# Altium PCB PCB.pcbdoc (part 1 of 3)
Units mm, origin at the board's own origin, x right, y up, seen from the top; angles counter-clockwise.
Board outline 351.03 x 186.31 mm, 2 copper layers (Top Layer, Bottom Layer); 478 components, 293 nets, 1523 pads, 747 vias.
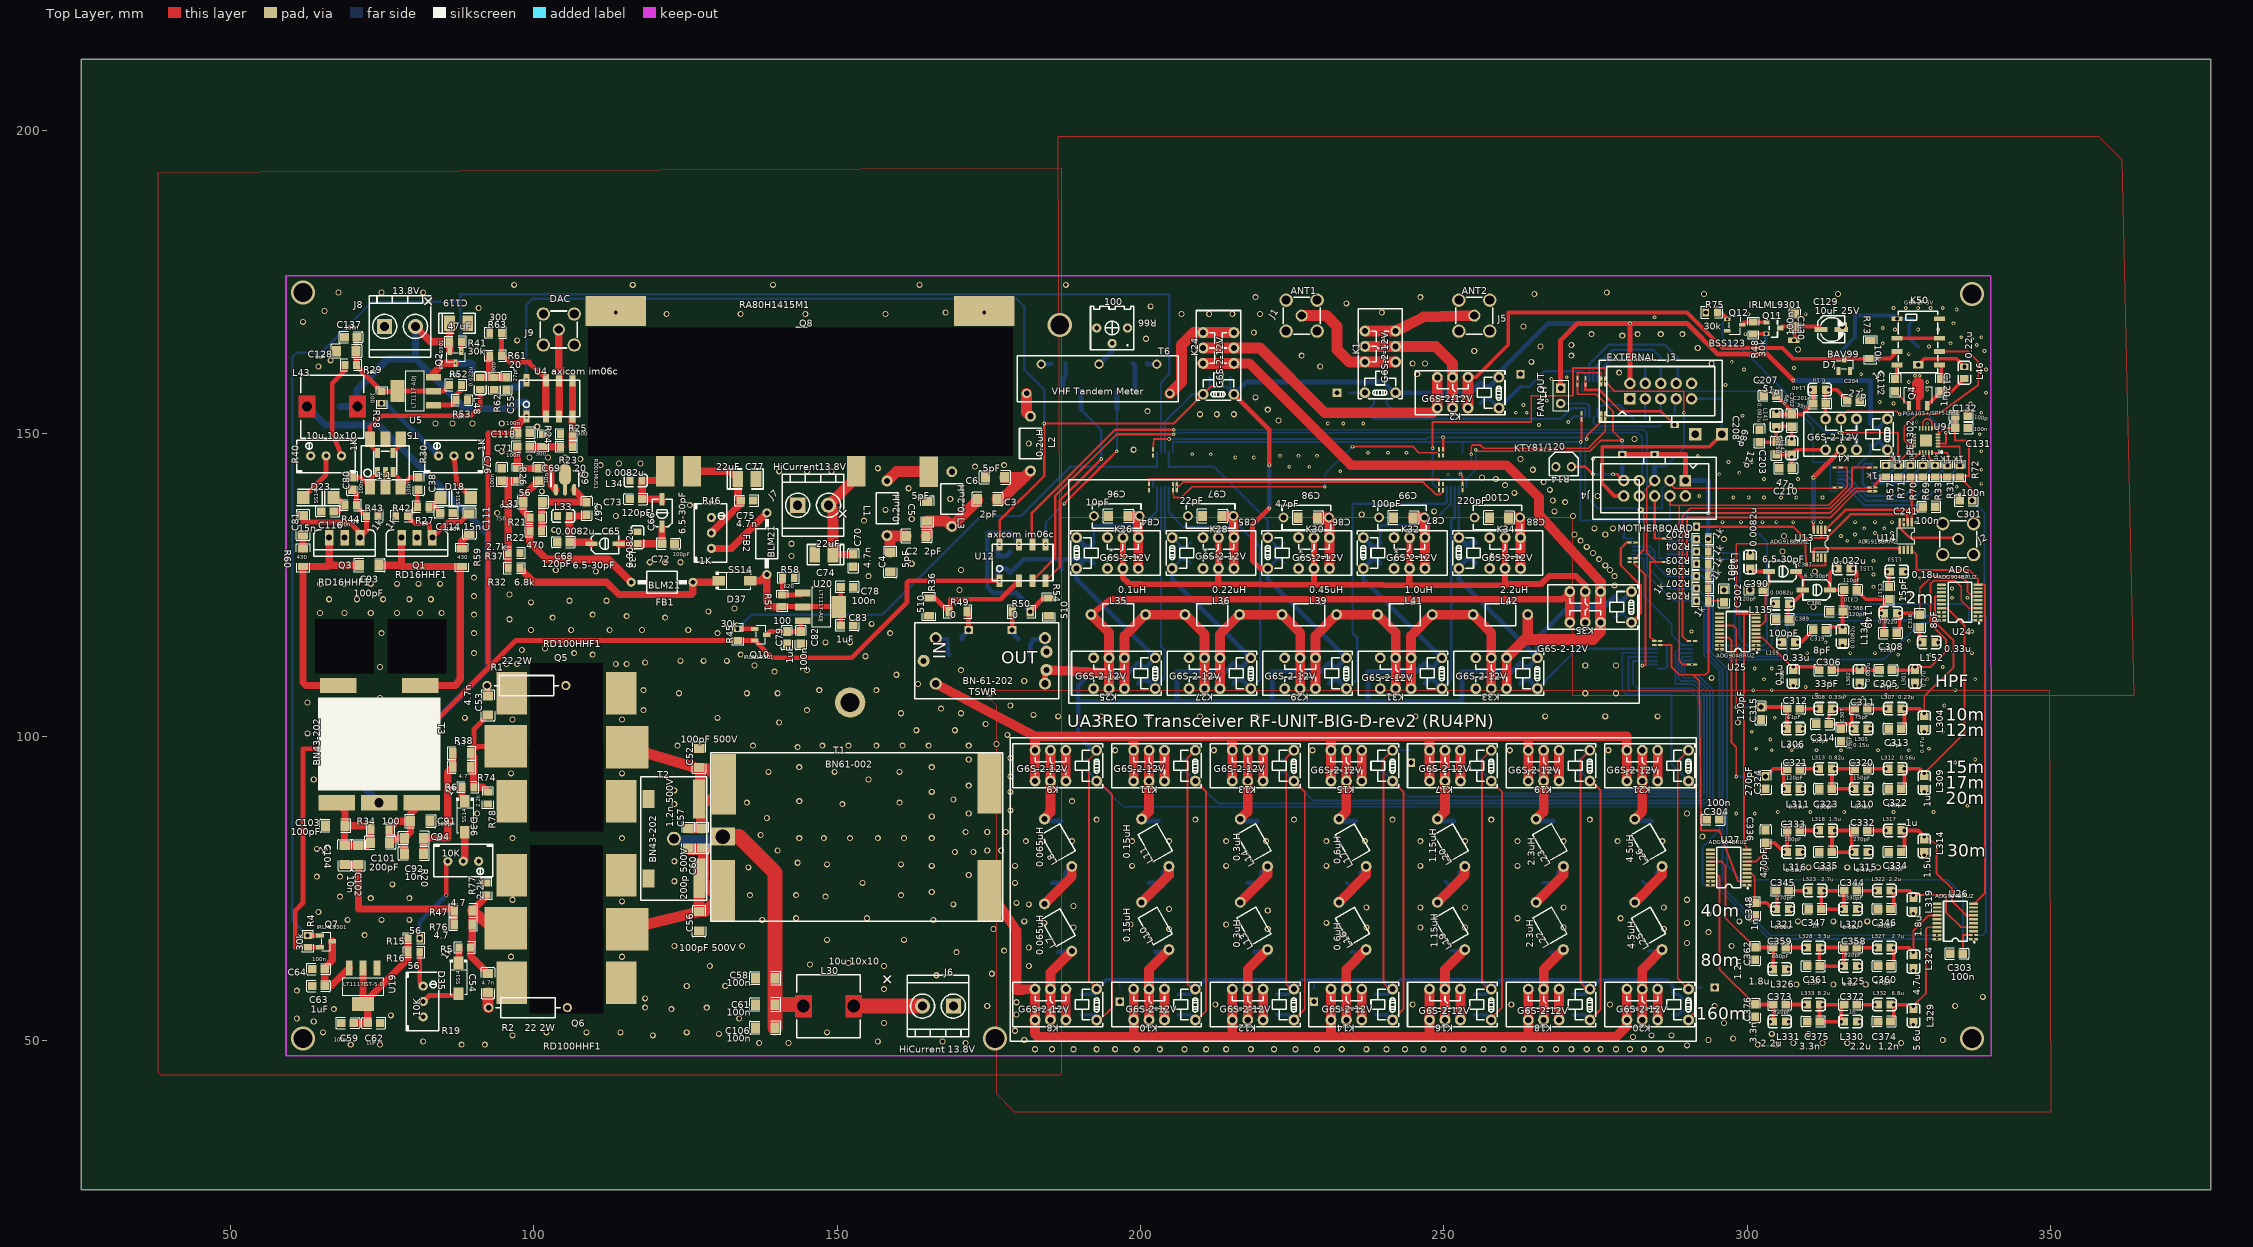
[diagram p0: Top Layer view]
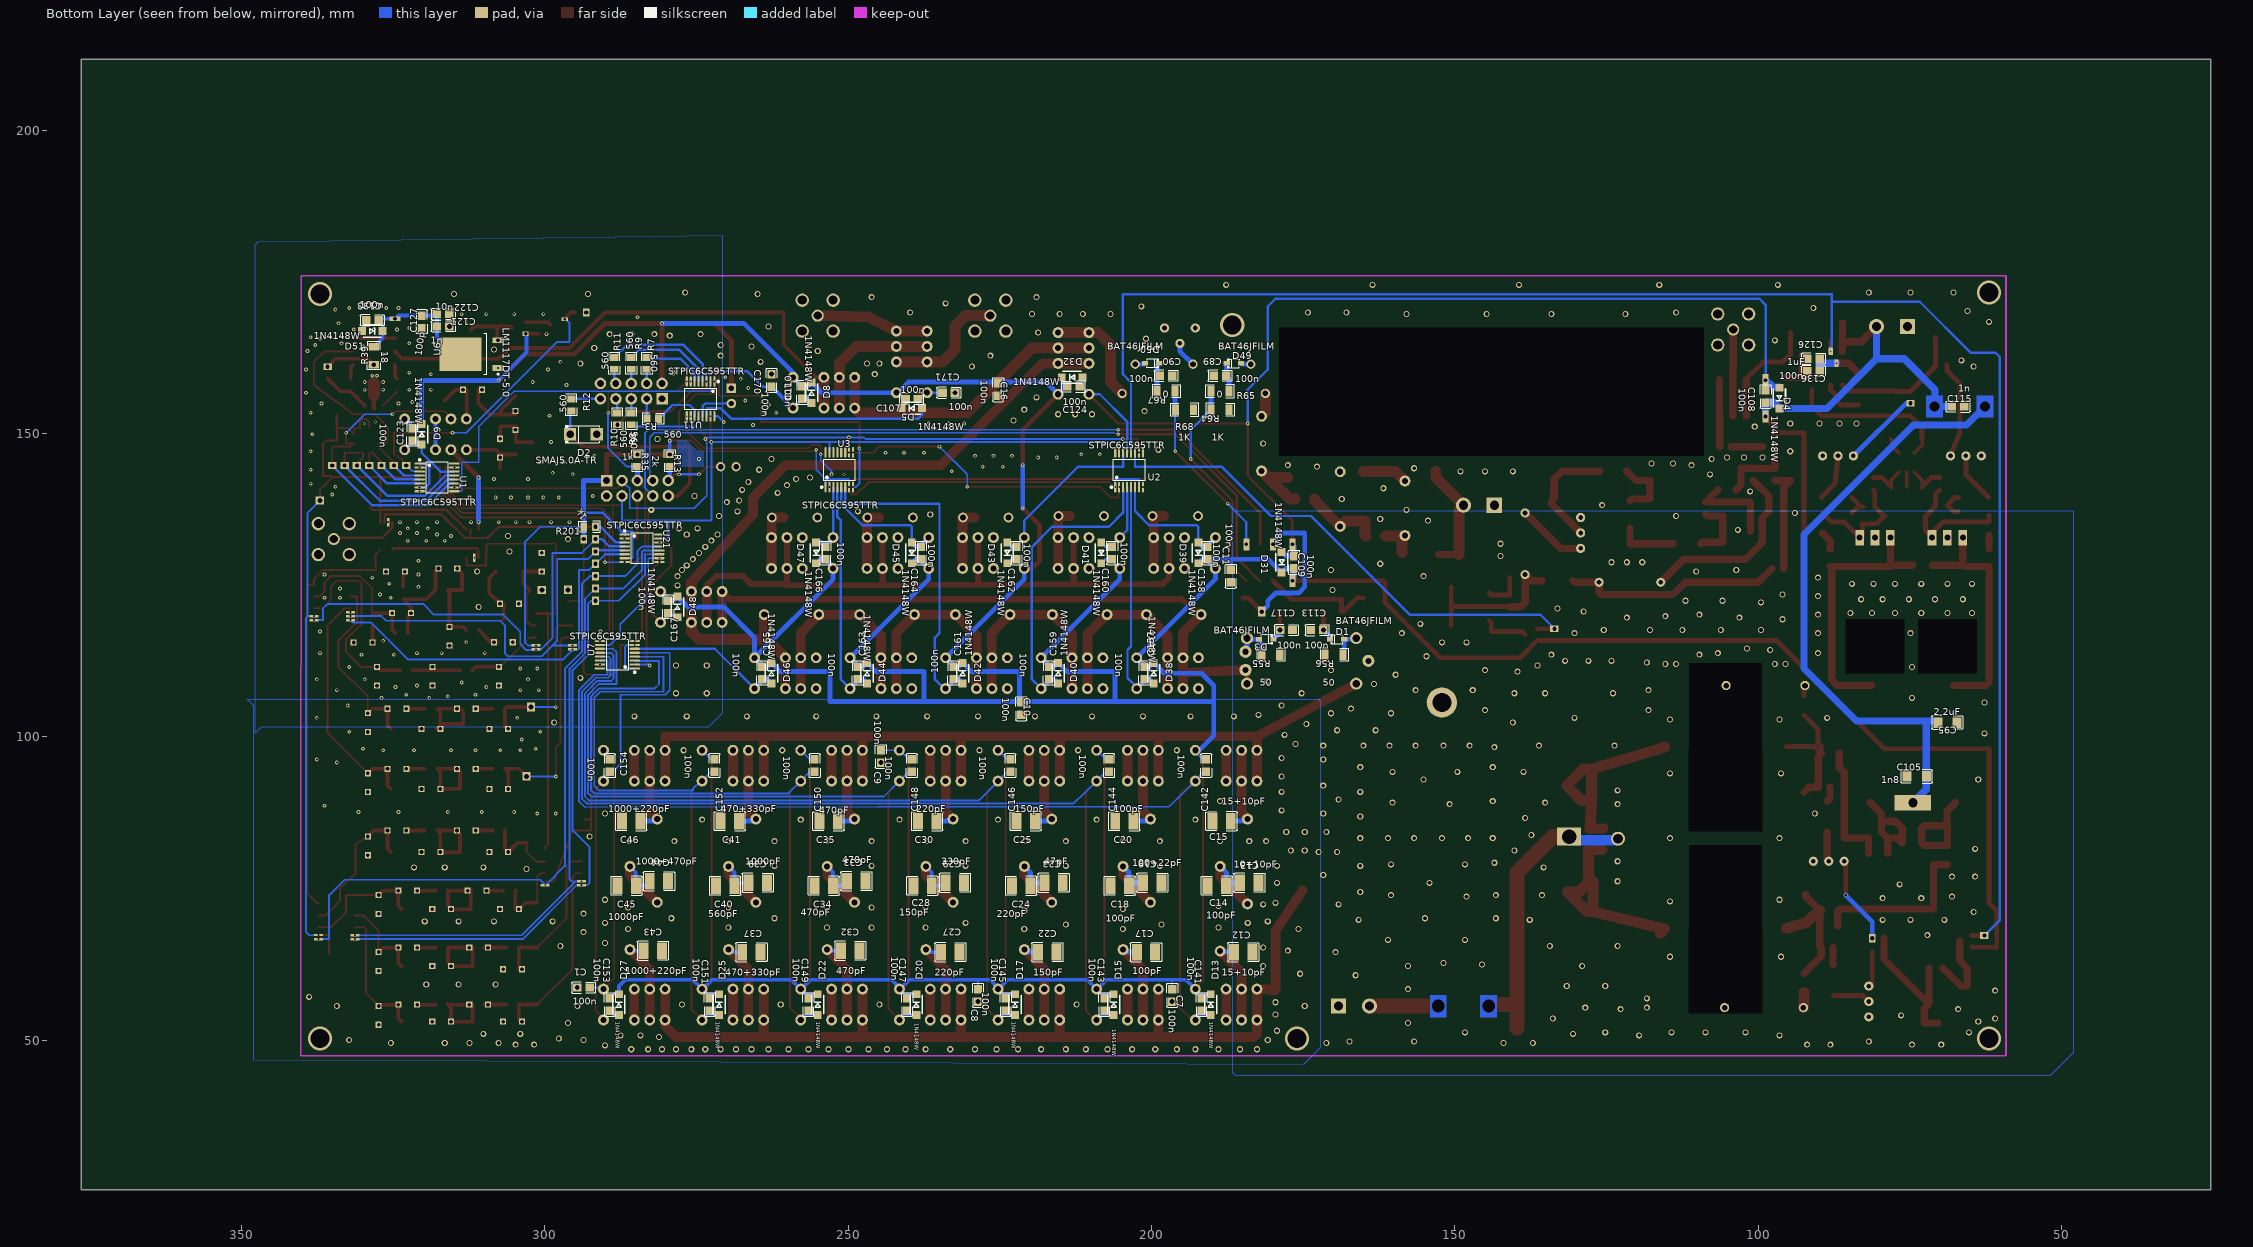
[diagram p1: Bottom Layer view, seen from below]

## Layer stack, top to bottom
Top Layer: signal copper (thickness not stored)
Dielectric: dielectric 0.32, FR-4, Dk 4.8
Bottom Layer: signal copper (thickness not stored)

## Board outline
376.428,25.4 25.4,25.4 25.4,211.709 376.428,211.709
cut-out: 64.008,119.38 64.008,110.49 68.834,110.49 73.66,110.49 73.66,119.38
cut-out: 75.946,119.38 75.946,110.49 80.772,110.49 85.598,110.49 85.598,119.38

## Components (designator, comment, footprint, x,y, rotation, side; value= is the part's Value field where it differs from the comment)
C1 "100n" C0805#1 293.624,58.674 r180 bottom
C2 "2pF" C1206#1 163.068,133.096 r180 top
C3 "2pF" C1206#1 174.752,139.192 r180 top
C4 "5pF" C1206#1 158.75,128.778 r90 top
C5 "5pF" C1206#1 164.846,137.16 r270 top
C6 "5pF" C1206#1 176.022,142.748 r0 top
C7 "100n" C0805#1 196.596,57.404 r90 bottom
C8 "100n" C0805#1 228.6,57.404 r90 bottom
C9 "100n" C0805#1 244.602,96.774 r90 bottom
C10 "100n" C0805#2 221.488,104.648 r90 bottom
C11 "100n" C0805#2 186.944,126.492 r90 bottom
C12 "15+10pF" C1210 184.912,64.516 r180 bottom
C13 "10+10pF" C1210 183.896,75.946 r180 bottom
C14 "100pF" C1210 189.23,75.438 r0 bottom
C15 "15+10pF" C1210 188.468,86.106 r0 bottom
C16 "100n" C0805#2 225.298,157.226 r90 bottom
C17 "100pF" C1210 200.914,64.516 r180 bottom
C18 "100+22pF" C1210 205.232,75.438 r0 bottom
C19 "100pF" C1210 199.898,75.946 r180 bottom
C20 "100pF" C1210 204.47,86.106 r0 bottom
C22 "150pF" C1210 217.17,64.516 r180 bottom
C23 "47pF" C1210 216.154,75.946 r180 bottom
C24 "220pF" C1210 221.488,75.438 r0 bottom
C25 "150pF" C1210 220.726,86.106 r0 bottom
C27 "220pF" C1210 233.172,64.516 r180 bottom
C28 "150pF" C1210 237.744,75.438 r0 bottom
C29 "330pF" C1210 232.41,75.946 r180 bottom
C30 "220pF" C1210 236.982,86.106 r0 bottom
C32 "470pF" C1210 249.682,64.77 r180 bottom
C33 "470pF" C1210 248.666,76.2 r180 bottom
C34 "470pF" C1210 254,75.438 r0 bottom
C35 "470pF" C1210 253.238,86.106 r0 bottom
C37 "470+330pF" C1210 265.938,64.516 r180 bottom
C38 "100n" C0805#3 81.026,141.732 r90 top
C39 "1000pF" C1210 264.922,75.946 r180 bottom
C40 "560pF" C1210 270.256,75.438 r0 bottom
C41 "470+330pF" C1210 269.494,86.106 r0 bottom
C43 "1000+220pF" C1210 282.194,64.77 r180 bottom
C44 "1000+470pF" C1210 281.178,76.2 r180 bottom
C45 "1000pF" C1210 286.512,75.438 r0 bottom
C46 "1000+220pF" C1210 285.75,86.106 r0 bottom
C52 "100pF 500V" C1206#1 127.254,96.52 r90 top
C53 "4.7n" C1206#1 92.456,105.156 r90 top
C54 "4.7n" C1206#1 92.456,59.436 r270 top
C55 "27pF" C0805#3 95.504,158.242 r90 top
C56 "100pF 500V" C1206#1 127.254,69.596 r90 top
C57 "1.2n 500V" C1206#1 125.476,83.312 r90 top
C58 "100n" C1206#1 138.176,60.198 r0 top
C59 "100n" C0805#3 69.342,52.832 r180 top
C60 "200p 500V" C1206#1 127.762,83.312 r90 top
C61 "100n" C1206#1 138.176,55.88 r0 top
C62 "1uF" C0805#3 73.66,52.832 r0 top
C63 "1uF" C0805#3 64.516,58.928 r180 top
C64 "100n" C0805#3 64.516,61.722 r180 top
C65 "6.5-30pF" CAP-ADJ-SMD_L4.5-W3.2-L 111.76,131.826 r0 top
C66 "6.5-30pF" CAP-ADJ-SMD_L4.5-W3.2-L 121.158,136.906 r90 top
C67 "100n" C0805#3 108.712,137.668 r270 top
C68 "120pF" C0805#3 104.902,132.08 r0 top
C69 "10n" C0805#3 100.838,143.256 r270 top
C70 "4.7n" C0805#3 152.654,129.032 r270 top
C71 "100n" C0805#3 98.298,147.828 r180 top
C72 "100pF" C0805#3 122.174,131.826 r180 top
C73 "120pF" C0805#3 116.84,139.192 r0 top
C74 "22uF" CASE-B_3528 147.828,130.048 r0 top
C75 "4.7n" C0805#3 135.128,138.938 r0 top
C76 "100n" C0805#3 94.742,143.256 r270 top
C77 "22uF" CASE-B_3528 135.128,142.494 r180 top
C78 "100n" C0805#3 151.638,124.714 r180 top
C79 "1uF" C0805#3 141.732,116.332 r90 top
C80 "100n" C0805#3 70.104,141.732 r90 top
C81 "15n" C1206#1 61.976,134.874 r90 top
C82 "100n" C0805#3 144.018,116.332 r90 top
C83 "1uF" C0805#3 151.638,118.364 r180 top
C84 "10pF" C1206#1 196.342,136.398 r180 top
C85 "22pF" C1206#1 211.836,136.398 r180 top
C86 "47pF" C1206#1 227.584,136.144 r180 top
C87 "100pF" C1206#1 243.332,136.144 r180 top
C88 "220pF" C1206#1 259.08,136.144 r180 top
C89 "100n" C0805#2 188.722,159.512 r180 bottom
C90 "100n" C0805#2 197.612,159.512 r180 bottom
C91 "100pF" C1206#1 81.28,86.106 r180 top
C92 "10n" C1206#1 80.264,80.772 r0 top
C93 "100pF" C1206#1 72.898,128.27 r180 top
C94 "1n" C1206#1 80.264,83.312 r0 top
C95 "2.2uF" C1206#2 68.834,102.362 r180 bottom
C96 "*" CAP-TH_L8.0-W4.0-P7.50-D0.6 196.088,136.398 r180 top
C97 "*" CAP-TH_L8.0-W4.0-P7.50-D0.6 211.582,136.398 r180 top
C98 "*" CAP-TH_L8.0-W4.0-P7.50-D0.6 227.33,136.144 r180 top
C99 "*" CAP-TH_L8.0-W4.0-P7.50-D0.6 243.078,136.144 r180 top
C100 "*" CAP-TH_L8.0-W4.0-P7.50-D0.6 258.826,136.144 r180 top
C101 "200pF" C1206#1 74.676,82.55 r180 top
C102 "10n" C1206#1 71.12,80.518 r270 top
C103 "100pF" C1206#1 67.31,85.344 r0 top
C104 "1n" C1206#1 68.834,80.518 r270 top
C105 "1n8" C1206#2 73.914,93.472 r0 bottom
C106 "100n" C1206#1 138.176,52.07 r0 top
C107 "100n" C0805#2 239.522,155.702 r0 bottom
C108 "100n" C0805#2 98.806,156.083 r90 bottom
C109 "100n" C0805#2 176.53,128.778 r90 bottom
C110 "100n" C0805#2 257.556,156.718 r270 bottom
C111 "15n" C1206#1 89.408,135.128 r90 top
C112 "1n" C0805#3 324.358,157.988 r270 top
C113 "100n" C0805#4 172.72,117.602 r180 bottom
C114 "100n" C0805#3 85.598,136.906 r0 top
C115 "1n" C0805#2 67.056,154.432 r0 bottom
C116 "100n" C0805#3 66.04,137.16 r0 top
C117 "100n" C0805#1 177.8,117.602 r180 bottom
C118 "100n" C0805#3 98.298,150.114 r0 top
C119 "47uF" CASE-B_3528 87.63,168.148 r180 top
C120 "1n" C0805#3 331.978,157.988 r270 top
C121 "10n" C0805#4 316.738,167.64 r180 bottom
C122 "1n" C0805#2 316.738,169.672 r180 bottom
C123 "100n" C0805#2 321.818,149.86 r270 bottom
C124 "100n" C0805#2 212.852,157.734 r0 bottom
C126 "1uF" C0805#2 90.932,162.306 r180 bottom
C127 "100p" C0805#2 320.294,168.402 r270 bottom
C128 "1uF" C1206#1 69.088,163.576 r180 top
C129 "10uF 25V" CAP-D4.0×H5.5 312.166,167.132 r180 top
C130 "100n" C0805#3 307.848,168.656 r270 top
C131 "100n" C0805#3 335.28,150.876 r0 top
C132 "100p" C0805#3 335.28,152.908 r0 top
C133 "100n" C0805#2 328.422,168.656 r180 bottom
C136 "100n" C0805#2 90.932,160.274 r180 bottom
C137 "100n" C0805#3 69.85,165.862 r180 top
C141 "100n" C0805#2 191.77,55.88 r90 bottom
C142 "100n" C0805#2 191.008,95.25 r270 bottom
C143 "100n" C0805#2 207.772,55.88 r90 bottom
C144 "100n" C0805#2 207.01,95.25 r270 bottom
C145 "100n" C0805#2 224.028,55.88 r90 bottom
C146 "100n" C0805#2 223.266,95.25 r270 bottom
C147 "100n" C0805#2 240.284,55.88 r90 bottom
C148 "100n" C0805#2 239.522,95.25 r270 bottom
C149 "100n" C0805#2 256.54,55.88 r90 bottom
C150 "100n" C0805#2 255.524,95.25 r270 bottom
C151 "100n" C0805#2 272.796,55.88 r90 bottom
C152 "100n" C0805#2 272.034,95.25 r270 bottom
C153 "100n" C0805#2 289.306,55.88 r90 bottom
C154 "100n" C0805#2 289.306,95.25 r270 bottom
C157 "100n" C0805#2 201.168,110.49 r270 bottom
C158 "100n" C0805#2 190.754,130.302 r90 bottom
C159 "100n" C0805#2 216.916,110.49 r270 bottom
C160 "100n" C0805#2 206.502,130.302 r90 bottom
C161 "100n" C0805#2 232.664,110.49 r270 bottom
C162 "100n" C0805#2 222.25,130.302 r90 bottom
C163 "100n" C0805#2 248.412,110.49 r270 bottom
C164 "100n" C0805#2 237.998,130.302 r90 bottom
C165 "100n" C0805#2 264.16,110.49 r270 bottom
C166 "100n" C0805#2 253.746,130.302 r90 bottom
C167 "100n" C0805#2 279.654,121.412 r270 bottom
C170 "100n" C0805#4 262.636,158.75 r90 bottom
C171 "100n" C0805#4 233.426,156.718 r180 bottom
C201 "39p" C0805#3 311.912,154.94 r180 top
C202 "68p" C0805#3 307.34,152.146 r270 top
C203 "12p" C0805#3 304.8,147.574 r270 top
C204 "27p" C0805#3 317.5,155.448 r180 top
C207 "51p" C0805#3 303.784,156.21 r0 top
C208 "68p" C0805#3 302.006,149.606 r270 top
C210 "47p" C0805#3 306.324,144.272 r180 top
C241 "100n" C0805#3 329.946,137.922 r0 top
C301 "100n" C0805#5 336.042,138.938 r180 top
C302 "100n" C0805#6 296.164,123.19 r90 top
C303 "100n" C0805#3 334.518,64.262 r180 top
C304 "100n" C0805#3 294.386,86.36 r0 top
C305 "47pF" C0805#3 322.834,110.998 r180 top
C306 "33pF" C0805#3 312.928,110.998 r180 top
C307 "39pF" C0805#3 315.468,100.33 r90 top
C308 "110pF" C0805#3 323.596,117.094 r180 top
C310 "110pF" C0805#3 316.992,124.206 r180 top
C311 "75pF" C0805#3 318.77,104.648 r180 top
C312 "61pF" C0805#3 307.594,104.648 r180 top
C313 "47pF" C0805#3 324.358,101.346 r0 top
C314 "100pF" C0805#3 312.42,102.108 r0 top
C315 "120pF" C0805#6 302.26,103.886 r90 top
C316 "8pF" C0805#3 328.422,119.126 r90 top
C317 "15pF" C0805#3 323.342,123.698 r270 top
C319 "8pF" C0805#3 311.912,117.602 r0 top
C320 "150pF" C0805#3 318.77,94.742 r180 top
C321 "120pF" C0805#3 307.594,94.742 r180 top
C322 "100pF" C0805#3 324.358,91.44 r0 top
C323 "330pF" C0805#3 312.928,91.44 r0 top
C324 "270pF" C0805#6 303.022,92.456 r90 top
C332 "270pF" C0805#3 318.77,84.582 r180 top
C333 "180pF" C0805#3 307.594,84.582 r180 top
C334 "180pF" C0805#3 324.358,81.026 r0 top
C335 "560pF" C0805#3 312.928,81.026 r0 top
C336 "470pF" C0805#3 303.022,83.566 r270 top
C344 "330pF" C0805#3 316.992,74.676 r180 top
C345 "270pF" C0805#3 305.816,74.676 r180 top
C346 "330pF" C0805#3 322.58,71.628 r0 top
C347 "1n" C0805#3 311.15,71.628 r0 top
C348 "1n" C0805#3 301.244,71.628 r90 top
C358 "820pF" C0805#3 316.992,65.278 r180 top
C359 "680pF" C0805#3 305.308,65.278 r180 top
C360 "470pF" C0805#3 322.58,62.23 r0 top
C361 "1.5n" C0805#3 310.896,62.23 r0 top
C362 "1.2n" C0805#3 301.244,64.262 r90 top
C372 "1n" C0805#3 316.992,55.88 r180 top
C373 "820pF" C0805#3 305.308,55.88 r180 top
C374 "1.2n" C0805#3 322.58,53.086 r0 top
C375 "3.3n" C0805#3 310.896,53.086 r0 top
C376 "3.3n" C0805#3 301.244,54.864 r90 top
C386 "6.5-30pF" CAP-ADJ-SMD_L4.5-W3.2-L 311.404,124.206 r180 top
C387 "6.5-30pF" CAP-ADJ-SMD_L4.5-W3.2-L 305.816,127.254 r180 top
C388 "120pF" C0805#3 314.706,120.65 r0 top
C389 "100pF" C0805#3 305.816,119.38 r0 top
C390 "120pF" C0805#5 301.498,124.206 r0 top
D1 "BAT46JFILM" SOD-323_L1.8-W1.3-LS2.5-RD 169.418,116.078 r0 bottom
D2 "SMAJ5.0A-TR" SMA_L4.3-W2.6-LS5.2-RD 293.624,149.86 r0 bottom
D3 "BAT46JFILM" SOD-323_L1.8-W1.3-LS2.5-RD 181.102,116.078 r180 bottom
D4 "1N4148W" SOD-123FL_L2.6-W1.6-LS3.4-RD 96.52,155.829 r90 bottom
D5 "1N4148W" SOD-123FL_L2.6-W1.6-LS3.4-RD 239.522,154.178 r180 bottom
D7 "BAV99" SOT-23-3_L2.9-W1.3-P1.90-LS2.4-BR#1 315.976,161.29 r270 top
D8 "1N4148W" SOD-123FL_L2.6-W1.6-LS3.4-RD 256.032,156.718 r270 bottom
D9 "1N4148W" SOD-123FL_L2.6-W1.6-LS3.4-RD 320.294,149.86 r270 bottom
D13 "1N4148W" SOD-123FL_L2.6-W1.6-LS3.4-RD 190.246,55.88 r270 bottom
D15 "1N4148W" SOD-123FL_L2.6-W1.6-LS3.4-RD 206.248,55.88 r270 bottom
D17 "1N4148W" SOD-123FL_L2.6-W1.6-LS3.4-RD 222.504,55.88 r270 bottom
D18 "SS14" SS14 87.122,139.446 r0 top
D20 "1N4148W" SOD-123FL_L2.6-W1.6-LS3.4-RD 238.76,55.88 r270 bottom
D22 "1N4148W" SOD-123FL_L2.6-W1.6-LS3.4-RD 255.016,55.88 r270 bottom
D23 "SS14" SS14 64.516,139.446 r180 top
D25 "1N4148W" SOD-123FL_L2.6-W1.6-LS3.4-RD 271.272,55.88 r270 bottom
D27 "1N4148W" SOD-123FL_L2.6-W1.6-LS3.4-RD 287.782,55.88 r270 bottom
D31 "1N4148W" SOD-123FL_L2.6-W1.6-LS3.4-RD 178.562,128.778 r90 bottom
D32 "1N4148W" SOD-123FL_L2.6-W1.6-LS3.4-RD 213.106,159.258 r180 bottom
D35 "SS14" SMA_L4.4-W2.8-LS5.4-RD 87.63,60.198 r270 top
D36 "SS14" SMA_L4.4-W2.8-LS5.4-RD 88.646,86.868 r270 top
D37 "SS14" SMA_L4.4-W2.8-LS5.4-RD 133.096,125.73 r0 top
D38 "1N4148W" SOD-123FL_L2.6-W1.6-LS3.4-RD 199.644,110.49 r270 bottom
D39 "1N4148W" SOD-123FL_L2.6-W1.6-LS3.4-RD 192.278,130.302 r90 bottom
D40 "1N4148W" SOD-123FL_L2.6-W1.6-LS3.4-RD 215.392,110.49 r270 bottom
D41 "1N4148W" SOD-123FL_L2.6-W1.6-LS3.4-RD 208.28,130.302 r90 bottom
D42 "1N4148W" SOD-123FL_L2.6-W1.6-LS3.4-RD 231.14,110.49 r270 bottom
D43 "1N4148W" SOD-123FL_L2.6-W1.6-LS3.4-RD 223.774,130.302 r90 bottom
D44 "1N4148W" SOD-123FL_L2.6-W1.6-LS3.4-RD 246.888,110.49 r270 bottom
D45 "1N4148W" SOD-123FL_L2.6-W1.6-LS3.4-RD 239.522,130.302 r90 bottom
D46 "1N4148W" SOD-123FL_L2.6-W1.6-LS3.4-RD 262.636,110.49 r270 bottom
D47 "1N4148W" SOD-123FL_L2.6-W1.6-LS3.4-RD 255.27,130.302 r90 bottom
D48 "1N4148W" SOD-123FL_L2.6-W1.6-LS3.4-RD 278.13,121.412 r270 bottom
D49 "BAT46JFILM" SOD-323_L1.8-W1.3-LS2.5-RD 186.436,161.544 r0 bottom
D50 "BAT46JFILM" SOD-323_L1.8-W1.3-LS2.5-RD 199.898,161.544 r180 bottom
D51 "1N4148W" SOD-123FL_L2.6-W1.6-LS3.4-RD 328.422,166.878 r0 bottom
FB1 "BLM21" FERRITE_BEAD 121.158,125.476 r180 top
FB2 "BLM21" FERRITE_BEAD 138.43,131.826 r270 top
H1 "FAN_OUT" HDR-F-2.54_1X2 269.24,156.21 r270 top
J1 "ANT1" SMA-TH_BWSMA-KE-Z001 226.568,169.418 r0 top
J2 "ADC" SMA-TH_BWSMA-KE-Z001 334.772,132.588 r0 top
J3 "EXTERNAL" IDC-10 285.75,156.972 r0 top
J4 "MOTHERBOARD" IDC-10 284.734,140.97 r180 top
J5 "ANT2" SMA-TH_BWSMA-KE-Z001 255.016,169.418 r0 top
J6 "HiCurrent 13.8V" CONN-TH_TY500-5.08-02P-14-00AH 166.624,55.626 r180 top
J7 "HiCurrent13.8V" CONN-TH_TY500-5.08-02P-14-00AH 146.05,138.176 r0 top
J8 "13.8V" CONN-TH_TY500-5.08-02P-14-00AH 77.978,167.64 r0 top
J9 "DAC" SMA-TH_BWSMA-KE-Z001 104.14,167.132 r0 top
K1 "G6S-2-12V" RELAY-TH_G6S-2-X 239.522,161.798 r90 top
K2 "G6S-2-12V" RELAY-TH_G6S-2-X 254,156.718 r180 top
K4 "G6S-2-12V" RELAY-TH_G6S-2-X 318.008,149.86 r180 top
K8 "G6S-2-12V" RELAY-TH_G6S-2-X 187.706,55.88 r180 top
K9 "G6S-2-12V" RELAY-TH_G6S-2-X 187.706,95.25 r180 top
K10 "G6S-2-12V" RELAY-TH_G6S-2-X 203.962,55.88 r180 top
K11 "G6S-2-12V" RELAY-TH_G6S-2-X 203.962,95.25 r180 top
K12 "G6S-2-12V" RELAY-TH_G6S-2-X 220.218,55.88 r180 top
K13 "G6S-2-12V" RELAY-TH_G6S-2-X 220.218,95.25 r180 top
K14 "G6S-2-12V" RELAY-TH_G6S-2-X 236.474,55.88 r180 top
K15 "G6S-2-12V" RELAY-TH_G6S-2-X 236.474,95.25 r180 top
K16 "G6S-2-12V" RELAY-TH_G6S-2-X 252.73,55.88 r180 top
K17 "G6S-2-12V" RELAY-TH_G6S-2-X 252.73,95.25 r180 top
K18 "G6S-2-12V" RELAY-TH_G6S-2-X 268.986,55.88 r180 top
K19 "G6S-2-12V" RELAY-TH_G6S-2-X 268.986,95.25 r180 top
K20 "G6S-2-12V" RELAY-TH_G6S-2-X 285.242,55.88 r180 top
K21 "G6S-2-12V" RELAY-TH_G6S-2-X 285.242,95.25 r180 top
K24 "G6S-2-12V" RELAY-TH_G6S-2-X 212.852,161.544 r90 top
K25 "G6S-2-12V" RELAY-TH_G6S-2-X 197.358,110.49 r180 top
K26 "G6S-2-12V" RELAY-TH_G6S-2-X 194.564,130.302 r0 top
K27 "G6S-2-12V" RELAY-TH_G6S-2-X 213.106,110.49 r180 top
K28 "G6S-2-12V" RELAY-TH_G6S-2-X 210.312,130.302 r0 top
K29 "G6S-2-12V" RELAY-TH_G6S-2-X 228.854,110.49 r180 top
K30 "G6S-2-12V" RELAY-TH_G6S-2-X 226.06,130.302 r0 top
K31 "G6S-2-12V" RELAY-TH_G6S-2-X 244.602,110.49 r180 top
K32 "G6S-2-12V" RELAY-TH_G6S-2-X 241.808,130.302 r0 top
K33 "G6S-2-12V" RELAY-TH_G6S-2-X 260.35,110.49 r180 top
K34 "G6S-2-12V" RELAY-TH_G6S-2-X 257.556,130.302 r0 top
K35 "G6S-2-12V" RELAY-TH_G6S-2-X 275.844,121.412 r180 top
K50 "G6K-2F-5V" RELAY-TH_G6K-2F-Y 328.168,165.1 r270 top
L1 "0.2uH" BEAD-TH_BD3.5-L4.7-P8.70-D0.7 158.242,137.668 r270 top
L2 "0.2uH" BEAD-TH_BD3.5-L4.7-P8.70-D0.7 181.864,148.336 r90 top
L3 "0.2uH" BEAD-TH_BD3.5-L4.7-P8.70-D0.7 168.91,139.192 r270 top
L7 "0.065uH" BEAD-TH_BD3.5-L4.7-P8.70-D0.7 186.436,68.58 r120 top
L8 "0.065uH" BEAD-TH_BD3.5-L4.7-P8.70-D0.7 186.436,82.55 r120 top
L10 "0.15uH" BEAD-TH_BD3.5-L4.7-P8.70-D0.7 202.438,68.834 r120 top
L11 "0.15uH" BEAD-TH_BD3.5-L4.7-P8.70-D0.7 202.438,82.55 r120 top
L13 "0.3uH" BEAD-TH_BD3.5-L4.7-P8.70-D0.7 218.694,68.834 r120 top
L14 "0.3uH" BEAD-TH_BD3.5-L4.7-P8.70-D0.7 218.694,82.55 r120 top
L16 "0.6uH" BEAD-TH_BD3.5-L4.7-P8.70-D0.7 234.95,68.834 r120 top
L17 "0.6uH" BEAD-TH_BD3.5-L4.7-P8.70-D0.7 234.95,82.55 r120 top
L19 "1.15uH" BEAD-TH_BD3.5-L4.7-P8.70-D0.7 251.206,68.834 r120 top
L20 "1.15uH" BEAD-TH_BD3.5-L4.7-P8.70-D0.7 251.206,82.55 r120 top
L22 "2.3uH" BEAD-TH_BD3.5-L4.7-P8.70-D0.7 267.462,68.834 r120 top
L23 "2.3uH" BEAD-TH_BD3.5-L4.7-P8.70-D0.7 267.462,82.55 r120 top
L25 "4.5uH" BEAD-TH_BD3.5-L4.7-P8.70-D0.7 283.718,68.834 r120 top
L26 "4.5uH" BEAD-TH_BD3.5-L4.7-P8.70-D0.7 283.718,82.55 r120 top
L30 "10u 10x10" B82464Z4 148.59,55.626 r0 top
L31 "0.22u" L1206 99.822,138.684 r180 top
L32 "0.0082u" L0805#1 117.094,132.842 r270 top
L33 "0.0082u" L0805#1 104.902,136.398 r0 top
L34 "0.0082u" L0805#1 116.84,142.24 r0 top
L35 "0.1uH" BEAD-TH_BD3.5-L4.7-P8.70-D0.7 196.342,120.142 r0 top
L36 "0.22uH" BEAD-TH_BD3.5-L4.7-P8.70-D0.7 211.836,120.142 r0 top
L39 "0.45uH" BEAD-TH_BD3.5-L4.7-P8.70-D0.7 227.838,120.142 r0 top
L41 "1.0uH" BEAD-TH_BD3.5-L4.7-P8.70-D0.7 243.586,120.142 r0 top
L42 "2.2uH" BEAD-TH_BD3.5-L4.7-P8.70-D0.7 259.334,120.142 r0 top
L43 "10u 10x10" B82464Z4 66.802,154.432 r0 top
L46 "0.22u" L0805#2 335.788,160.02 r90 top
L48 "0.022u" L0805#1 91.186,158.242 r270 top
L134 "0.0082u" L0805-WOLF 315.722,116.586 r90 top
L135 "0.0082u" L0805-WOLF 305.816,121.92 r0 top
L136 "0.0082u" L0805-WOLF 300.482,128.778 r270 top
L140 "0.1u" L0805-WOLF 311.912,157.226 r180 top
L141 "0.082u" L0805-WOLF 304.8,152.146 r270 top
L142 "0.15u" L0805-WOLF 307.341,147.573 r270 top
L149 "0.022u" L0805-WOLF 323.596,120.396 r180 top
L151 "0.022u" L0805-WOLF 315.976,127.762 r180 top
L152 "0.33u" L0805-WOLF 329.946,115.57 r180 top
L153 "0.18u" L0805-WOLF 324.612,127.254 r180 top
L155 "0.33u" L0805-WOLF 306.832,115.57 r0 top
L301 "0.27u" L0805-WOLF 327.66,109.982 r90 top
L302 "0.082u" L0805-WOLF 318.516,109.982 r90 top
L303 "0.1u" L0805-WOLF 307.594,109.982 r90 top
L304 "0.47u" L0805-WOLF 329.184,102.362 r90 top
L305 "0.15u" L0805-WOLF 318.77,101.346 r180 top
L306 "0.15u" L0805-WOLF 307.594,101.346 r180 top
L307 "0.27u" L0805-WOLF 324.358,104.648 r180 top
L308 "0.33u" L0805-WOLF 312.928,104.648 r180 top
L309 "1u" L0805-WOLF 329.184,92.456 r90 top
L310 "0.33u" L0805-WOLF 318.77,91.44 r180 top
L311 "0.33u" L0805-WOLF 307.594,91.44 r180 top
L312 "0.56u" L0805-WOLF 324.358,94.742 r180 top
L313 "0.82u" L0805-WOLF 312.928,94.742 r180 top
L314 "1.5u" L0805-WOLF 329.184,82.042 r90 top
L315 "0.47u" L0805-WOLF 318.77,81.026 r180 top
L316 "0.56u" L0805-WOLF 307.594,81.026 r180 top
L317 "1u" L0805-WOLF 324.358,84.582 r180 top
L318 "1.5u" L0805-WOLF 312.928,84.582 r180 top
L319 "1.8u" L0805-WOLF 327.406,72.39 r90 top
L320 "0.68u" L0805-WOLF 316.992,71.628 r180 top
L321 "0.82u" L0805-WOLF 305.816,71.628 r180 top
L322 "2.2u" L0805-WOLF 322.58,74.676 r180 top
L323 "2.7u" L0805-WOLF 311.15,74.676 r180 top
L324 "4.7u" L0805-WOLF 327.406,62.992 r90 top
L325 "1.5u" L0805-WOLF 316.992,62.23 r180 top
L326 "1.8u" L0805-WOLF 305.308,61.722 r180 top
L327 "2.7u" L0805-WOLF 322.58,65.278 r180 top
L328 "3.3u" L0805-WOLF 310.896,65.278 r180 top
L329 "5.6u" L0805-WOLF 327.406,54.102 r90 top
L330 "2.2u" L0805-WOLF 316.992,53.086 r180 top
L331 "2.2u" L0805-WOLF 305.308,53.086 r180 top
L332 "6.8u" L0805-WOLF 322.58,55.88 r180 top
L333 "8.2u" L0805-WOLF 310.896,55.88 r180 top
Q1 "RD16HHF1" TO220V 80.772,132.842 r180 top
Q2 "IRLML9301" SOT-23-3_L2.9-W1.3-P1.90-LS2.4-BR#2 87.122,162.56 r90 top
Q3 "RD16HHF1" TO220V 68.834,132.842 r180 top
Q4 "PGA103+/SPF5189Z" SOT-89-3_L4.5-W2.5-P1.50-LS4.2-TL 328.168,155.956 r90 top
Q5 "RD100HHF1" "RD100HHF WOLF" 105.41,98.298 r0 top
Q6 "RD100HHF1" "RD100HHF WOLF" 105.41,68.326 r0 top
Q7 "IRLML9301" SOT-23-3_L2.9-W1.3-P1.90-LS2.4-BR#1 65.786,66.294 r180 top
Q8 "RA80H1415M1" RA80H1415M1 108.966,146.304 r0 top
Q9 "RD01MUS1" RD01MUS1 105.156,141.986 r270 top
Q10 "IRLML9301" SOT-23-3_L2.9-W1.3-P1.90-LS2.4-BR#1 137.414,116.84 r180 top
Q11 "IRLML9301" SOT-23_L2.9-W1.3-P1.90-LS2.4-BR 304.292,167.386 r180 top
Q12 "BSS123" SOT-23-3_L2.9-W1.6-P1.90-LS2.8-BR 297.942,167.894 r180 top
R1 "22 2W" RES-TH_BD3.3-L9.0-P13.00-D0.6 98.806,108.458 r0 top
R2 "22 2W" RES-TH_BD3.3-L9.0-P13.00-D0.6 99.06,55.372 r0 top
R3 "560" R0805#1 282.194,152.4 r180 bottom
R4 "30k" R0805#2 62.738,66.294 r90 top
R5 "1k" R0805#3 88.646,65.278 r0 top
R6 "1k" R0805#3 89.154,91.694 r0 top
R7 "560" R0805#1 283.21,161.544 r270 bottom
R8 "560" R0805#1 285.75,152.4 r270 bottom
R9 "560" R0805#1 285.75,161.544 r270 bottom
R10 "560" R0805#4 288.036,152.4 r270 bottom
R11 "560" R0805#1 288.544,161.544 r270 bottom
R12 "560" R0805#1 295.656,154.686 r270 bottom
R13 "2k" R0805#4 279.4,145.542 r90 bottom
R14 "KTY81/120" RES-TH_KTY81 269.748,144.526 r180 top
R15 "56" R0805#2 80.264,66.802 r0 top
R16 "56" R0805#3 80.264,64.516 r0 top
R19 "10K" RES-ADJ-TH_3296W 81.788,56.388 r0 top
R20 "10K" RES-ADJ-TH_3296W 88.392,79.502 r270 top
R21 "750" R0805#3 100.33,136.144 r180 top
R22 "470" R0805#3 100.33,133.858 r180 top
R23 "20" R0805#3 105.41,147.828 r0 top
R24 "300" R0805#3 101.6,148.844 r270 top
R25 "300" R0805#3 105.41,149.86 r0 top
R26 "56" R0805#3 97.282,143.256 r90 top
R27 "56" R0805#3 81.788,137.922 r180 top
R28 "100" R0805#2 74.93,155.956 r270 top
R29 "100" R0805#3 69.85,161.29 r180 top
R30 "1K" RES-ADJ-TH_3296W 86.868,146.304 r90 top
R31 "1k" R0805#2 332.994,143.764 r90 top
R32 "6.8k" R0805#3 96.774,127.762 r180 top
R33 "1k" R0805#2 330.962,143.764 r90 top
R34 "100" R1206#1 74.676,84.836 r180 top
R35 "1k" R0805#4 284.734,145.542 r90 bottom
R36 "510" R1206#1 165.1,121.412 r90 top
R37 "2.7k" R0805#3 96.774,130.302 r180 top
R38 "4.7" R1206#1 88.138,97.282 r0 top
R39 "18" R1206#2 328.168,162.814 r270 bottom
R40 "1K" RES-ADJ-TH_3296W 65.786,146.304 r90 top
R41 "30k" R0805#3 87.122,165.1 r0 top
R42 "1k" R0805#3 78.232,136.398 r0 top
R43 "1k" R0805#3 73.406,136.398 r0 top
R44 "56" R0805#3 69.85,138.176 r0 top
R45 "30k" R0805#2 133.604,116.84 r90 top
R46 "1K" RES-ADJ-TH_3296W 129.286,133.604 r0 top
R47 "4.7" R1206#1 88.392,71.374 r0 top
R48 "30k" R0805#3 300.99,167.386 r270 top
R49 "0" R1206#1 169.926,120.65 r0 top
R50 "0" R1206#3 180.34,120.65 r180 top
R51 "100" R0805#3 140.97,122.428 r270 top
R52 "200" R0805#3 87.122,157.988 r180 top
R53 "1.2k" R0805#3 88.138,155.448 r180 top
R54 "510" R1206#1 184.912,121.412 r270 top
R55 "50" R1206#4 180.34,113.538 r180 bottom
R56 "50" R1206#4 169.926,113.538 r180 bottom
R57 "1k" R0805#2 322.834,143.764 r90 top
R58 "620" R0805#3 141.986,126.238 r0 top
R59 "430" R1206#1 88.138,129.54 r90 top
R60 "430" R1206#1 61.976,129.54 r270 top
R61 "20" R0805#3 93.726,162.814 r0 top
R62 "300" R0805#3 93.472,158.242 r90 top
R63 "300" R0805#3 93.726,166.624 r0 top
R64 "1K" R1206#4 188.722,153.924 r180 bottom
R65 "0" R1206#4 188.722,156.972 r0 bottom
R66 "100" RES-ADJ-TH_3362P 195.326,166.116 r180 top
R67 "0" R1206#4 197.612,156.972 r180 bottom
R68 "1K" R1206#4 194.564,153.924 r0 bottom
R69 "1k" R0805#2 328.93,143.764 r90 top
R70 "1k" R0805#2 326.898,143.764 r90 top
R71 "1k" R0805#2 324.866,143.764 r90 top
R72 "1k" R0805#2 335.026,143.764 r90 top
R73 "10k" R1206#1 320.294,163.83 r270 top
R74 "4.7" R1206#1 88.138,94.996 r0 top
R75 "30k" R0805#2 294.132,169.926 r180 top
R76 "4.7" R1206#1 88.392,69.088 r0 top
R77 "2.2k" R0805#3 92.202,74.93 r90 top
R78 "2.2k" R0805#3 92.456,89.916 r90 top
R201 "1k" R0805#5 292.608,134.62 r0 bottom
R202 "1k" R0805#6 292.608,132.588 r180 top
R203 "1k" R0805#2 292.608,128.524 r180 top
R204 "1k" R0805#2 292.608,130.556 r180 top
R205 "1k" R0805#2 292.608,122.428 r180 top
R206 "1k" R0805#2 292.608,126.492 r180 top
R207 "1k" R0805#2 292.608,124.46 r180 top
T1 "BN61-002" "BN61-002 WOLF" 129.286,69.596 r0 top
T2 "BN43-202" "BN43-202 WOLF" 118.618,84.328 r0 top
T3 "BN43-202" "BN43-202_RD16 WOLF" 77.724,99.314 r270 top
T5 "1:1" ATD1+TC1 79.248,149.098 r180 top
T6 "VHF Tandem Meter" "VHF SWR METER" 193.04,159.004 r0 top
TSWR "BN-61-202" BN43-202_TANDEM 175.514,112.522 r0 top
U1 "STPIC6C595TTR" TSSOP-16_L5.0-W4.4-P0.65-LS6.4-BL#1 317.754,142.748 r90 bottom
U2 "STPIC6C595TTR" TSSOP-16_L5.0-W4.4-P0.65-LS6.4-BL#2 203.708,144.018 r0 bottom
U3 "STPIC6C595TTR" TSSOP-16_L5.0-W4.4-P0.65-LS6.4-BL#3 251.46,144.018 r0 bottom
U4 "axicom im06c" IM06C#1 98.806,152.781 r0 top
U5 "LT1117-ADJ" SOT-223-3_L6.5-W3.4-P2.30-LS7.0-BR 80.518,156.972 r0 top
U6 "LM1117DT-5.0" TD03B 311.912,163.068 r270 bottom
U7 "STPIC6C595TTR" TSSOP-16_L5.0-W4.4-P0.65-LS6.4-BL#4 288.036,113.538 r270 bottom
U9 "PE4302" QFN-20L_L4.0-W4.0-P0.50-BL-EP2.0 329.438,148.844 r90 top
U11 "STPIC6C595TTR" TSSOP-16_L5.0-W4.4-P0.65-LS6.4-BL#5 274.32,155.702 r180 bottom
U12 "axicom im06c" IM06C#2 176.784,125.73 r0 top
U13 "ADG918BRMZ" MSOP-8_L3.0-W3.0-P0.65-LS4.9-BL#1 311.912,131.826 r180 top
U14 "ADG918BRMZ" MSOP-8_L3.0-W3.0-P0.65-LS4.9-BL#2 326.136,133.096 r180 top
U19 "LT1117IST-5.0" SOT-223-3_L6.5-W3.4-P2.30-LS7.0-BR 71.882,58.928 r90 top
U20 "LT1117-ADJ" SOT-223-3_L6.5-W3.4-P2.30-LS7.0-BR 147.32,121.412 r180 top
U21 "STPIC6C595TTR" TSSOP-16_L5.0-W4.4-P0.65-LS6.4-BL#6 283.972,131.064 r90 bottom
U24 "ADG904BRUZ" TSSOP-20#1 335.026,122.174 r180 top
U25 "ADG904BRUZ" TSSOP-20#2 298.45,117.348 r180 top
U26 "ADG904BRUZ" TSSOP-20#3 334.264,69.596 r180 top
U27 "ADG904BRUZ" TSSOP-20#4 296.926,78.486 r180 top

## Footprints (in the part's own frame and the unit in brackets; to place one, negate y for a bottom-side part, rotate by r counter-clockwise, add the part's x,y. Pads: shape width x height; smd on the part's side, far side on the other; paste and mask are expansions set on the pad)
ATD1+TC1 [mil]
  rect 64.96x100 smd: 1(45.5,311) 2(145.5,311) 3(245.5,311) 4(245.5,1) 5(145.5,1) 6(45.5,1)
  round 0 smd: 1(54.59,256.91) 2(145.5,263.5) 3(220.51,241.01) 4(234.57,51.73) 6(56.43,51.73)
  rect 31.5x64.96 smd: 1(95.5,216) 2(145.5,216) 3(195.5,216) 4(195.5,90.8) 6(95.5,90.8)
  Top Layer region: 135.66,216 135.66,311 135.7,311.91 135.83,312.81 136.03,313.69 136.32,314.56 136.69,315.39 137.13,316.18 137.65,316.93 138.23,317.63 138.87,318.27 139.57,318.86 140.32,319.37 141.11,319.81 141.95,320.18 142.81,320.47 143.69,320.68 144.59,320.8 145.5,320.84 146.41,320.8 147.31,320.68 148.2,320.47 149.06,320.18 149.89,319.81 150.68,319.37 151.43,318.86 152.13,318.27 152.78,317.63 153.36,316.93 153.87,316.18 154.31,315.39 154.68,314.56 154.97,313.69 155.18,312.81 155.3,311.91 155.34,311 155.34,216 155.3,215.09 155.18,214.19 154.97,213.31 154.68,212.44 154.31,211.61 153.87,210.82 153.36,210.07 152.78,209.37 152.13,208.73 151.43,208.15 150.68,207.63 149.89,207.19 149.06,206.82 148.2,206.53 147.31,206.33 146.41,206.2 145.5,206.16 144.59,206.2 143.69,206.33 142.81,206.53 141.95,206.82 141.11,207.19 140.32,207.63 139.57,208.15 138.87,208.73 138.23,209.37 137.65,210.07 137.13,210.82 136.69,211.61 136.32,212.44 136.03,213.31 135.83,214.19 135.7,215.09
  Top Layer region: 88.54,209.04 38.54,259.04 37.89,259.76 37.32,260.53 36.82,261.36 36.41,262.23 36.08,263.14 35.85,264.08 35.71,265.04 35.66,266 35.66,311 35.7,311.91 35.83,312.81 36.03,313.69 36.32,314.56 36.69,315.39 37.13,316.18 37.65,316.93 38.23,317.63 38.87,318.27 39.57,318.86 40.32,319.37 41.11,319.81 41.95,320.18 42.81,320.47 43.69,320.68 44.59,320.8 45.5,320.84 46.41,320.8 47.31,320.68 48.2,320.47 49.06,320.18 49.89,319.81 50.68,319.37 51.43,318.86 52.13,318.27 52.78,317.63 53.36,316.93 53.87,316.18 54.31,315.39 54.68,314.56 54.97,313.69 55.18,312.81 55.3,311.91 55.34,311 55.34,270.08 102.46,222.96 103.07,222.29 103.62,221.56 104.1,220.79 104.51,219.98 104.83,219.13 105.08,218.25 105.25,217.36 105.33,216.46 105.33,215.55 105.25,214.64 105.08,213.75 104.83,212.87 104.51,212.02 104.1,211.21 103.62,210.44 103.07,209.71 102.46,209.04 101.79,208.43 101.06,207.88 100.29,207.4 99.48,207 98.63,206.67 97.75,206.42 96.86,206.25 95.96,206.17 95.05,206.17 94.14,206.25 93.25,206.42 92.37,206.67 91.53,207 90.71,207.4 89.94,207.88 89.21,208.43
  Top Layer region: 202.46,97.76 252.46,47.76 253.11,47.05 253.68,46.27 254.18,45.44 254.59,44.57 254.92,43.66 255.15,42.72 255.3,41.77 255.34,40.8 255.34,1 255.3,0.09 255.18,-0.81 254.97,-1.69 254.68,-2.56 254.31,-3.39 253.87,-4.18 253.36,-4.93 252.78,-5.63 252.13,-6.27 251.43,-6.85 250.68,-7.37 249.89,-7.81 249.06,-8.18 248.2,-8.47 247.31,-8.67 246.41,-8.8 245.5,-8.84 244.59,-8.8 243.69,-8.67 242.81,-8.47 241.95,-8.18 241.11,-7.81 240.32,-7.37 239.57,-6.85 238.87,-6.27 238.23,-5.63 237.65,-4.93 237.13,-4.18 236.69,-3.39 236.32,-2.56 236.03,-1.69 235.83,-0.81 235.7,0.09 235.66,1 235.66,36.72 188.54,83.84 187.93,84.51 187.38,85.24 186.9,86.01 186.5,86.82 186.17,87.67 185.92,88.55 185.75,89.44 185.67,90.35 185.67,91.26 185.75,92.16 185.92,93.05 186.17,93.93 186.5,94.78 186.9,95.59 187.38,96.36 187.93,97.09 188.54,97.76 189.21,98.37 189.94,98.92 190.71,99.4 191.53,99.81 192.37,100.13 193.25,100.38 194.14,100.55 195.05,100.63 195.96,100.63 196.86,100.55 197.75,100.38 198.63,100.13 199.48,99.81 200.29,99.4 201.06,98.92 201.79,98.37
  Top Layer region: 102.46,83.84 55.34,36.72 55.34,1 55.3,0.09 55.18,-0.81 54.97,-1.69 54.68,-2.56 54.31,-3.39 53.87,-4.18 53.36,-4.93 52.78,-5.63 52.13,-6.27 51.43,-6.85 50.68,-7.37 49.89,-7.81 49.06,-8.18 48.2,-8.47 47.31,-8.67 46.41,-8.8 45.5,-8.84 44.59,-8.8 43.69,-8.67 42.81,-8.47 41.95,-8.18 41.11,-7.81 40.32,-7.37 39.57,-6.85 38.87,-6.27 38.23,-5.63 37.65,-4.93 37.13,-4.18 36.69,-3.39 36.32,-2.56 36.03,-1.69 35.83,-0.81 35.7,0.09 35.66,1 35.66,40.8 35.71,41.77 35.85,42.72 36.08,43.66 36.41,44.57 36.82,45.44 37.32,46.27 37.89,47.05 38.54,47.76 88.54,97.76 89.21,98.37 89.94,98.92 90.71,99.4 91.53,99.81 92.37,100.13 93.25,100.38 94.14,100.55 95.05,100.63 95.96,100.63 96.86,100.55 97.75,100.38 98.63,100.13 99.48,99.81 100.29,99.4 101.06,98.92 101.79,98.37 102.46,97.76 103.07,97.09 103.62,96.36 104.1,95.59 104.51,94.78 104.83,93.93 105.08,93.05 105.25,92.16 105.33,91.26 105.33,90.35 105.25,89.44 105.08,88.55 104.83,87.67 104.51,86.82 104.1,86.01 103.62,85.24 103.07,84.51
  Top Layer region: 188.54,222.96 235.66,270.08 235.66,311 235.7,311.91 235.83,312.81 236.03,313.69 236.32,314.56 236.69,315.39 237.13,316.18 237.65,316.93 238.23,317.63 238.87,318.27 239.57,318.86 240.32,319.37 241.11,319.81 241.95,320.18 242.81,320.47 243.69,320.68 244.59,320.8 245.5,320.84 246.41,320.8 247.31,320.68 248.2,320.47 249.06,320.18 249.89,319.81 250.68,319.37 251.43,318.86 252.13,318.27 252.78,317.63 253.36,316.93 253.87,316.18 254.31,315.39 254.68,314.56 254.97,313.69 255.18,312.81 255.3,311.91 255.34,311 255.34,266 255.3,265.04 255.15,264.08 254.92,263.14 254.59,262.23 254.18,261.36 253.68,260.53 253.11,259.76 252.46,259.04 202.46,209.04 201.79,208.43 201.06,207.88 200.29,207.4 199.48,207 198.63,206.67 197.75,206.42 196.86,206.25 195.96,206.17 195.05,206.17 194.14,206.25 193.25,206.42 192.37,206.67 191.53,207 190.71,207.4 189.94,207.88 189.21,208.43 188.54,209.04 187.93,209.71 187.38,210.44 186.9,211.21 186.5,212.02 186.17,212.87 185.92,213.75 185.75,214.64 185.67,215.55 185.67,216.46 185.75,217.36 185.92,218.25 186.17,219.13 186.5,219.98 186.9,220.79 187.38,221.56 187.93,222.29
  silkscreen extent -11,45 301,266
B82464Z4 [mm]
  round 0 hole 1.62: 1(-4.15,0) 2(4.15,0)
  Top Layer region: 2.8,1.8 5.5,1.8 5.5,-1.8 2.8,-1.8
  Top Layer region: -5.5,1.8 -2.8,1.8 -2.8,-1.8 -5.5,-1.8
  Bottom Layer region: 2.8,1.8 5.5,1.8 5.5,-1.8 2.8,-1.8
  Bottom Layer region: -5.5,1.8 -2.8,1.8 -2.8,-1.8 -5.5,-1.8
  silkscreen extent -5.2,-5.2 5.2,5.2
BEAD-TH_BD3.5-L4.7-P8.70-D0.7 [mm]
  round 1.8 hole 1: 1(-4.5,0) 2(4.5,0)
  silkscreen extent -2.54,-1.8 2.54,1.8
"BN43-202 WOLF" [mm]
  rect 2x3 smd: 1(0.291,-7.671) 2(0.299,5.447)
  rect 2x6.5 smd: 3(8.701,-7.645) 4(8.65,5.43)
  round 2.3 hole 1.6: 5(4.504,-1.115)
  silkscreen extent -0.96,-11.22 9.91,9.07
"BN43-202_RD16 WOLF" [mm]
  rect 2.54x6 smd: P1(-9.144,3.556) P2(-9.144,-9.906) S1(10.16,3.81) S2(10.16,-10.16)
  rect 2.54x6 hole 1.524: P3(10.16,-3.2)
  silkscreen extent -7.11,-13.21 8.13,6.86
BN43-202_TANDEM [mm]
  round 2 hole 1.2: 1(-9.25,3.75) 2(8.75,3.75) 3(-9.25,-3.75) 4(8.75,-3.75)
  round 2 hole 1: 5(9,-1.5) 6(9,1.5) 7(-11.25,0)
  silkscreen extent -12.7,-6.25 11,6.25
"BN61-002 WOLF" [mm]
  rect 4x10 smd: 1(1.905,5.08) 2(2.032,22.606) 4(45.847,5.08) 5(45.847,22.733)
  rect 4x3 hole 2.398: 3(1.905,13.97)
  silkscreen extent -0.13,0 48.01,27.81
C0805#1 [mm]
  rect 1.41x1.35 smd: 1(1.03,0)
  rect 1.41x1.35 hole 0.808: 2(-1.03,0)
  silkscreen extent -1.96,-0.9 1.96,0.9
C0805#2 [mm]
  rect 1.41x1.35 smd: 1(1.03,0) 2(-1.03,0)
  silkscreen extent -1.96,-0.9 1.96,0.9
C0805#3 [mm]
  rect 1.41x1.35 smd: 1(-1.03,0) 2(1.03,0)
  silkscreen extent -1.96,-0.9 1.96,0.9
C0805#4 [mm]
  rect 1.41x1.35 hole 0.808: 1(1.03,0)
  rect 1.41x1.35 smd: 2(-1.03,0)
  silkscreen extent -1.96,-0.9 1.96,0.9
C0805#5 [mm]
  rect 1.41x1.35 hole 0.808: 1(-1.03,0)
  rect 1.41x1.35 smd: 2(1.03,0)
  silkscreen extent -1.96,-0.9 1.96,0.9
C0805#6 [mm]
  rect 1.41x1.35 smd: 1(-1.03,0)
  rect 1.41x1.35 hole 0.808: 2(1.03,0)
  silkscreen extent -1.96,-0.9 1.96,0.9
C1206#1 [mm]
  rect 1.485x1.728 smd: 1(-1.593,0) 2(1.593,0)
  silkscreen extent -2.56,-1.09 2.56,1.09
C1206#2 [mm]
  rect 1.485x1.728 smd: 1(1.593,0) 2(-1.593,0)
  silkscreen extent -2.56,-1.09 2.56,1.09
C1210 [mm]
  rect 1.635x2.7 smd: 1(1.517,0) 2(-1.517,0)
  silkscreen extent -2.56,-1.58 2.56,1.58
CAP-ADJ-SMD_L4.5-W3.2-L [mm]
  rect 2x0.8 smd: 1(-2.25,0) 2(2.25,0)
  silkscreen extent -2.29,-1.65 2.25,1.65
CAP-D4.0×H5.5 [mm]
  rect 2.2x0.8 smd: 1(0,0) 2(-3.302,0)
  silkscreen extent -3.94,-2.29 0.56,2.21
CAP-TH_L8.0-W4.0-P7.50-D0.6 [mm]
  round 1.6 hole 1: 1(-3.75,0) 2(3.75,0)
  silkscreen extent -4,-2 4,2
CASE-B_3528 [mm]
  rect 1.8x2.6 smd: 1(1.501,0) 2(-1.501,0)
  silkscreen extent -2.73,-1.65 3.26,1.65
CONN-TH_TY500-5.08-02P-14-00AH [mm]
  rect 2.5x2.5 hole 1.5: 1(-2.54,0)
  round 2.5 hole 1.5: 2(2.54,0)
  silkscreen extent -5.08,-5.08 5.08,5.08
FERRITE_BEAD [mm]
  round 1.5 hole 0.8 unplated: 1(-5.08,0) 2(5.08,0)
  silkscreen extent -4.04,-1.82 4.04,1.82
HDR-F-2.54_1X2 [mil]
  rect 62x62 hole 35: 1(-50,0)
  round 62 hole 35: 2(50,0)
  silkscreen extent -100,-49 100,50
IDC-10 [mm]
  rect 1.9x1.9 hole 1.1: 1(-5.08,-1.27)
  round 1.9 hole 1.1: 2(-5.08,1.27) 3(-2.54,-1.27) 4(-2.54,1.27) 5(0,-1.27) 6(0,1.27) 7(2.54,-1.27) 8(2.54,1.27) 9(5.08,-1.27) 10(5.08,1.27)
  silkscreen extent -10.16,-5.08 10.16,5.08
IM06C#1 [mm]
  rect 1x2 hole 0.61: 1(0,0) 8(0,6)
  rect 1x2 smd: 2(3.2,0) 3(5.4,0) 4(7.6,0) 5(7.6,6) 6(5.4,6) 7(3.2,6)
  silkscreen extent -1.2,0 8.8,6
IM06C#2 [mm]
  rect 1x2 hole 0.61: 1(0,0) 5(7.6,6) 7(3.2,6) 8(0,6)
  rect 1x2 smd: 2(3.2,0) 3(5.4,0) 4(7.6,0) 6(5.4,6)
  silkscreen extent -1.2,0 8.8,6
L0805#1 [mm]
  rect 1.133x1.377 smd: 1(-0.966,0) 2(0.966,0)
  silkscreen extent -1.95,-1.02 1.86,1.02
L0805#2 [mm]
  rect 1.133x1.377 smd: 1(-0.966,0)
  rect 1.133x1.377 hole 0.681: 2(0.966,0)
  silkscreen extent -1.95,-1.02 1.86,1.02
L0805-WOLF [mm]
  rect 1x1 hole 0.61: 1(-1.55,0.02) 2(1.55,0.02)
  rect 1.133x1.377 smd: 1(-0.966,0) 2(0.966,0)
  silkscreen extent -1.95,-1.02 1.86,1.02
L1206 [mm]
  rect 1.485x1.728 smd: 1(-1.593,0) 2(1.593,0)
  silkscreen extent -2.56,-1.09 2.56,1.09
MSOP-8_L3.0-W3.0-P0.65-LS4.9-BL#1 [mil]
  rect 15.98x55 smd: 1(-38.39,-90.56) 2(-12.8,-90.56) 3(12.8,-90.55) 4(38.39,-90.55) 5(38.39,90.56) 7(-12.8,90.55) 8(-38.39,90.55)
  rect 15.98x55 hole 12.01: 6(12.8,90.56)
  silkscreen extent -70,-91 59,51
MSOP-8_L3.0-W3.0-P0.65-LS4.9-BL#2 [mil]
  rect 15.98x55 smd: 1(-38.39,-90.56) 2(-12.8,-90.56) 4(38.39,-90.55) 5(38.39,90.56) 6(12.8,90.56) 7(-12.8,90.55) 8(-38.39,90.55)
  rect 15.98x55 hole 12.01: 3(12.8,-90.55)
  silkscreen extent -70,-91 59,51
QFN-20L_L4.0-W4.0-P0.50-BL-EP2.0 [mm]
  oval 0.28x0.8 smd: 1(-1,-2) 2(-0.5,-2) 3(0,-2) 4(0.5,-2) 5(1,-2) 11(1,2) 12(0.5,2) 13(0,2) 14(-0.5,2) 15(-1,2)
  oval 0.8x0.28 smd: 6(2,-1) 7(2,-0.5) 8(2,0) 9(2,0.5) 10(2,1) 16(-2,1) 17(-2,0.5) 18(-2,0) 19(-2,-0.5) 20(-2,-1)
  rect 2x2 smd: 21(0,0)
  silkscreen extent -2.15,-2.81 2.15,2.15
R0805#1 [mm]
  rect 1.133x1.377 smd: 1(0.966,0) 2(-0.966,0)
  silkscreen extent -1.76,-0.92 1.76,0.92
R0805#2 [mm]
  rect 1.133x1.377 smd: 1(-0.966,0)
  rect 1.133x1.377 hole 0.681: 2(0.966,0)
  silkscreen extent -1.76,-0.92 1.76,0.92
R0805#3 [mm]
  rect 1.133x1.377 smd: 1(-0.966,0) 2(0.966,0)
  silkscreen extent -1.76,-0.92 1.76,0.92
R0805#4 [mm]
  rect 1.133x1.377 hole 0.681: 1(0.966,0)
  rect 1.133x1.377 smd: 2(-0.966,0)
  silkscreen extent -1.76,-0.92 1.76,0.92
R0805#5 [mm]
  rect 1.133x1.377 smd: 1(0.966,0)
  rect 1.133x1.377 hole 0.681: 2(-0.966,0)
  silkscreen extent -1.76,-0.92 1.76,0.92
R0805#6 [mm]
  rect 1.133x1.377 hole 0.681: 1(-0.966,0) 2(0.966,0)
  silkscreen extent -1.76,-0.92 1.76,0.92
R1206#1 [mm]
  rect 1.208x1.701 smd: 1(-1.479,0) 2(1.479,0)
  silkscreen extent -2.31,-1.08 2.31,1.08
R1206#2 [mm]
  rect 1.208x1.701 hole 0.726: 1(1.479,0)
  rect 1.208x1.701 smd: 2(-1.479,0)
  silkscreen extent -2.31,-1.08 2.31,1.08
R1206#3 [mm]
  rect 1.208x1.701 hole 0.726: 1(-1.479,0)
  rect 1.208x1.701 smd: 2(1.479,0)
  silkscreen extent -2.31,-1.08 2.31,1.08
R1206#4 [mm]
  rect 1.208x1.701 smd: 1(1.479,0) 2(-1.479,0)
  silkscreen extent -2.31,-1.08 2.31,1.08
RA80H1415M1 [mm]
  rect 3.048x5 smd: 1(12.7,-2.54)
  rect 3x5 smd: 2(17.145,-2.54) 3(44.196,-2.54) 4(56.134,-2.603)
  rect 2x0.2 smd: 5(35.179,21.209)
  Multi-Layer board cut-out: 0,21.082 0,0 69.977,0 69.977,21.082
RD01MUS1 [mm]
  oval 1.9x0.7 smd: D(1.25,1.5) G(1.25,-1.5)
  oval 3.5x2 smd: S(-1.25,0)
  oval 2.1x0.7 smd: S(1.151,0)
  silkscreen extent -1.85,-2.3 0.75,2.3
"RD100HHF WOLF" [mm]
  rect 7x7 smd: D(10.033,0) G(-10.033,0.127)
  rect 5x7 smd: S(-9.017,-8.89) S(-9.017,8.89) S(9.017,-8.89) S(9.017,8.89)
  Multi-Layer board cut-out: 5.969,13.843 0,13.843 -5.969,13.843 -6.032,-13.843 6.032,-13.843
RELAY-TH_G6K-2F-Y [mm]
  rect 0.8x1.8 hole 0.61: 1(-3.8,-3.5)
  rect 0.8x1.8 smd: 2(-0.6,-3.5) 3(1.6,-3.5) 4(3.8,-3.5) 5(3.8,3.5) 6(1.6,3.5) 7(-0.6,3.5) 8(-3.8,3.5)
  silkscreen extent -5.07,-3.3 5.09,3.2
RELAY-TH_G6S-2-X [mm]
  round 1.8 hole 1: 1(-5.08,-2.54) 3(0,-2.54) 4(2.54,-2.54) 5(5.08,-2.54) 8(5.08,2.54) 9(2.54,2.54) 10(0,2.54) 12(-5.08,2.54)
  silkscreen extent -6.08,-3.65 8.72,3.65
RES-ADJ-TH_3296W [mil]
  round 60 hole 30: 1(0,100) 2(0,0) 3(0,-100)
  silkscreen extent -110,-190 100,190
RES-ADJ-TH_3362P [mil]
  round 60 hole 30: 1(-100,-50) 2(0,50) 3(100,-50)
  silkscreen extent -140,-190 140,90
RES-TH_BD3.3-L9.0-P13.00-D0.6 [mil]
  round 60 hole 36: 1(-255.91,0) 2(255.9,0)
  silkscreen extent -210,-65 210,65
RES-TH_KTY81 [mil]
  round 60 hole 35.43: 1(50,0) 2(-50,0)
  silkscreen extent -95,-95 95,60
SMA-TH_BWSMA-KE-Z001 [mm]
  round 2.2 hole 1.5: 1(-2.55,-2.55) 2(-2.55,2.55) 3(2.55,2.55) 4(2.55,-2.55)
  round 2 hole 1.35: 5(0,0)
  silkscreen extent -3.05,-3.05 3.05,3.05
SMA_L4.3-W2.6-LS5.2-RD [mm]
  rect 2x2 hole 1.199: 1(2.2,0) 2(-2.2,0)
  silkscreen extent -2.6,-1.5 2.98,1.5
SMA_L4.4-W2.8-LS5.4-RD [mm]
  rect 2.046x1.62 smd: 1(-2.566,0) 2(2.565,0)
  silkscreen extent -3.08,-1.44 2.7,1.44
SOD-123FL_L2.6-W1.6-LS3.4-RD [mm]
  rect 1.3x1.3 smd: 1(-1.7,0) 2(1.7,0)
  silkscreen extent -1.5,-1 1.5,1
SOD-323_L1.8-W1.3-LS2.5-RD [mm]
  rect 1x0.75 smd: 1(1.173,0) 2(-1.173,0)
  silkscreen extent -0.9,-0.8 1.08,0.8
SOT-23-3_L2.9-W1.3-P1.90-LS2.4-BR#1 [mm]
  rect 1.25x0.7 smd: 1(1,-0.95) 2(1,0.95) 3(-1,0)
  silkscreen extent -0.73,-1.53 0.73,1.53
SOT-23-3_L2.9-W1.3-P1.90-LS2.4-BR#2 [mm]
  rect 1.25x0.7 hole 0.305: 1(1,-0.95) 3(-1,0)
  rect 1.25x0.7 smd: 2(1,0.95)
  silkscreen extent -0.73,-1.53 0.73,1.53
SOT-23-3_L2.9-W1.6-P1.90-LS2.8-BR [mm]
  rect 1.07x0.6 hole 0.4: 1(1.235,-0.95)
  rect 1.07x0.6 smd: 2(1.235,0.95) 3(-1.235,0)
  silkscreen extent -0.88,-1.54 0.88,1.54
SOT-23_L2.9-W1.3-P1.90-LS2.4-BR [mm]
  rect 1x0.8 smd: 1(1.15,-0.95) 3(-1.15,0)
  rect 1x0.8 hole 0.61: 2(1.15,0.95)
  silkscreen extent -0.7,-1.5 0.7,1.5
SOT-89-3_L4.5-W2.5-P1.50-LS4.2-TL [mm]
  rect 1.575x0.672 smd: 1(-1.356,1.5) 3(-1.356,-1.5)
  round 0 smd: 2(1.356,-0.009)
  Top Layer region: 2.283,-0.959 0.429,-0.959 0.385,-0.958 0.34,-0.955 0.296,-0.949 0.252,-0.942 0.208,-0.933 0.165,-0.921 0.123,-0.908 0.081,-0.893 0.04,-0.875 0,-0.856 -0.04,-0.835 -0.078,-0.812 -0.115,-0.788 -0.151,-0.761 -0.185,-0.733 -0.219,-0.704 -0.251,-0.673 -0.281,-0.64 -0.31,-0.606 -0.337,-0.571 -0.362,-0.534 -0.386,-0.497 -0.408,-0.458 -0.428,-0.418 -0.447,-0.339 -2.144,-0.339 -2.144,0.321 -0.447,0.321 -0.428,0.401 -0.408,0.44 -0.386,0.479 -0.362,0.517 -0.337,0.553 -0.31,0.588 -0.281,0.622 -0.251,0.655 -0.219,0.686 -0.185,0.716 -0.151,0.744 -0.115,0.77 -0.078,0.795 -0.04,0.818 0,0.839 0.04,0.858 0.081,0.875 0.123,0.89 0.165,0.904 0.208,0.915 0.252,0.925 0.296,0.932 0.34,0.937 0.385,0.94 0.429,0.941 2.283,0.941 2.328,0.94 2.372,0.937 2.416,0.932 2.46,0.925 2.504,0.915 2.547,0.904 2.589,0.89 2.631,0.875 2.672,0.858 2.713,0.839 2.752,0.818 2.79,0.795 2.827,0.77 2.863,0.744 2.898,0.716 2.931,0.686 2.963,0.655 2.993,0.622 3.022,0.588 3.049,0.553 3.075,0.517 3.098,0.479 3.12,0.44 3.141,0.401 3.159,0.36 3.175,0.318 3.189,0.276 3.202,0.233 3.212,0.19 3.22,0.146 3.227,0.102 3.231,0.058 3.233,0.013 3.233,-0.031 3.231,-0.076 3.227,-0.12 3.22,-0.164 3.212,-0.208 3.202,-0.251 3.189,-0.294 3.175,-0.336 3.159,-0.377 3.141,-0.418 3.12,-0.458 3.098,-0.497 3.075,-0.534 3.049,-0.571 3.022,-0.606 2.993,-0.64 2.963,-0.673 2.931,-0.704 2.898,-0.733 2.863,-0.761 2.827,-0.788 2.79,-0.812 2.752,-0.835 2.713,-0.856 2.672,-0.875 2.631,-0.893 2.589,-0.908 2.547,-0.921 2.504,-0.933 2.46,-0.942 2.416,-0.949 2.372,-0.955 2.328,-0.958
  silkscreen extent -1,-2.33 1.65,2.33
SOT-223-3_L6.5-W3.4-P2.30-LS7.0-BR [mm]
  rect 2.5x1.1 smd: 1(2.97,-2.3) 2(2.97,0) 3(2.97,2.3)
  rect 2.34x3.6 smd: 4(-2.97,0)
  silkscreen extent -1.57,-3.33 1.37,3.33
SS14 [mm]
  rect 2x2.2 smd: 1(-2.5,0) 2(2.5,0)
  silkscreen extent -3.56,-1.4 3.56,1.4
TD03B [mil]
  rect 37.5x75.5 smd: 1(90,166)
  rect 37.5x75.5 hole 24: 3(-90,166)
  rect 217.5x272.5 smd: 4(0,-78)
  silkscreen extent -132,74 135,171
TO220V [mil]
  rect 55.7x100.3 hole 40: 1(-100,0) 2(0,0) 3(100,0)
  silkscreen extent -200,-50 200,120
TSSOP-16_L5.0-W4.4-P0.65-LS6.4-BL#1 [mm]
  oval 0.343x1.731 smd: 1(2.275,2.866) 3(0.975,2.866) 4(0.325,2.866) 5(-0.325,2.866) 6(-0.975,2.866) 9(-2.275,-2.866) 11(-0.975,-2.866) 12(-0.325,-2.866) 13(0.325,-2.866) 14(0.975,-2.866) 16(2.275,-2.866)
  oval 0.343x1.731 hole 0.305: 2(1.625,2.866) 7(-1.625,2.866) 8(-2.275,2.866) 10(-1.625,-2.866) 15(1.625,-2.866)
  silkscreen extent -2.58,-1.77 3.05,3.02
TSSOP-16_L5.0-W4.4-P0.65-LS6.4-BL#2 [mm]
  oval 0.343x1.731 hole 0.304: 1(2.275,2.866)
  oval 0.343x1.731 hole 0.305: 2(1.625,2.866) 8(-2.275,2.866) 10(-1.625,-2.866)
  oval 0.343x1.731 smd: 3(0.975,2.866) 4(0.325,2.866) 5(-0.325,2.866) 6(-0.975,2.866) 7(-1.625,2.866) 9(-2.275,-2.866) 11(-0.975,-2.866) 12(-0.325,-2.866) 13(0.325,-2.866) 14(0.975,-2.866) 15(1.625,-2.866) 16(2.275,-2.866)
  silkscreen extent -2.58,-1.77 3.05,3.02
TSSOP-16_L5.0-W4.4-P0.65-LS6.4-BL#3 [mm]
  oval 0.343x1.731 smd: 1(2.275,2.866) 3(0.975,2.866) 4(0.325,2.866) 5(-0.325,2.866) 6(-0.975,2.866) 11(-0.975,-2.866) 12(-0.325,-2.866) 13(0.325,-2.866) 14(0.975,-2.866) 15(1.625,-2.866) 16(2.275,-2.866)
  oval 0.343x1.731 hole 0.305: 2(1.625,2.866) 7(-1.625,2.866) 8(-2.275,2.866) 9(-2.275,-2.866) 10(-1.625,-2.866)
  silkscreen extent -2.58,-1.77 3.05,3.02
TSSOP-16_L5.0-W4.4-P0.65-LS6.4-BL#4 [mm]
  oval 0.343x1.731 smd: 1(2.275,2.866) 2(1.625,2.866) 3(0.975,2.866) 4(0.325,2.866) 5(-0.325,2.866) 6(-0.975,2.866) 10(-1.625,-2.866) 11(-0.975,-2.866) 12(-0.325,-2.866) 13(0.325,-2.866) 14(0.975,-2.866) 16(2.275,-2.866)
  oval 0.343x1.731 hole 0.305: 7(-1.625,2.866) 8(-2.275,2.866) 9(-2.275,-2.866) 15(1.625,-2.866)
  silkscreen extent -2.58,-1.77 3.05,3.02
TSSOP-16_L5.0-W4.4-P0.65-LS6.4-BL#5 [mm]
  oval 0.343x1.731 hole 0.305: 1(2.275,2.866) 3(0.975,2.866) 7(-1.625,2.866) 8(-2.275,2.866) 9(-2.275,-2.866) 10(-1.625,-2.866) 15(1.625,-2.866)
  oval 0.343x1.731 smd: 2(1.625,2.866) 4(0.325,2.866) 5(-0.325,2.866) 6(-0.975,2.866) 11(-0.975,-2.866) 12(-0.325,-2.866) 13(0.325,-2.866) 14(0.975,-2.866) 16(2.275,-2.866)
  silkscreen extent -2.58,-1.77 3.05,3.02
TSSOP-16_L5.0-W4.4-P0.65-LS6.4-BL#6 [mm]
  oval 0.343x1.731 smd: 1(2.275,2.866) 3(0.975,2.866) 4(0.325,2.866) 5(-0.325,2.866) 6(-0.975,2.866) 7(-1.625,2.866) 11(-0.975,-2.866) 12(-0.325,-2.866) 13(0.325,-2.866) 15(1.625,-2.866) 16(2.275,-2.866)
  oval 0.343x1.731 hole 0.305: 2(1.625,2.866) 8(-2.275,2.866) 9(-2.275,-2.866) 10(-1.625,-2.866) 14(0.975,-2.866)
  silkscreen extent -2.58,-1.77 3.05,3.02
TSSOP-20#1 [mm]
  rect 1.494x0.4 hole 0.305: 1(-3.001,2.925) 2(-3.001,2.275) 18(2.996,1.625) 19(2.996,2.275) 20(3.001,2.925)
  rect 1.494x0.4 smd: 3(-3.001,1.625) 4(-3.001,0.975) 5(-3.001,0.325) 6(-3.001,-0.324) 7(-3.001,-0.975) 8(-3.001,-1.625) 9(-3.001,-2.275) 10(-3.001,-2.925) 11(3.001,-2.925) 12(3.001,-2.275) 13(3.001,-1.625) 14(3.001,-0.975) 15(3.001,-0.325) 16(3.001,0.325) 17(3.001,0.975)
  silkscreen extent -3.25,-3.31 1.91,3.53
TSSOP-20#2 [mm]
  rect 1.494x0.4 hole 0.305: 1(-3.001,2.925) 2(-3.001,2.275) 19(2.996,2.275) 20(3.001,2.925)
  rect 1.494x0.4 smd: 3(-3.001,1.625) 4(-3.001,0.975) 5(-3.001,0.325) 6(-3.001,-0.324) 7(-3.001,-0.975) 8(-3.001,-1.625) 9(-3.001,-2.275) 10(-3.001,-2.925) 11(3.001,-2.925) 12(3.001,-2.275) 13(3.001,-1.625) 14(3.001,-0.975) 15(3.001,-0.325) 16(3.001,0.325) 17(3.001,0.975) 18(2.996,1.625)
  silkscreen extent -3.25,-3.31 1.91,3.53
TSSOP-20#3 [mm]
  rect 1.494x0.4 hole 0.305: 1(-3.001,2.925) 19(2.996,2.275) 20(3.001,2.925)
  rect 1.494x0.305 hole 0.305: 2(-3.001,2.275)
  rect 1.494x0.4 smd: 3(-3.001,1.625) 4(-3.001,0.975) 5(-3.001,0.325) 6(-3.001,-0.324) 7(-3.001,-0.975) 8(-3.001,-1.625) 9(-3.001,-2.275) 10(-3.001,-2.925) 11(3.001,-2.925) 12(3.001,-2.275) 13(3.001,-1.625) 14(3.001,-0.975) 15(3.001,-0.325) 16(3.001,0.325) 17(3.001,0.975) 18(2.996,1.625)
  silkscreen extent -3.25,-3.31 1.91,3.53
TSSOP-20#4 [mm]
  rect 1.494x0.4 hole 0.305: 1(-3.001,2.925) 19(2.996,2.275) 20(3.001,2.925)
  rect 1.494x0.4 smd: 2(-3.001,2.275) 3(-3.001,1.625) 4(-3.001,0.975) 5(-3.001,0.325) 6(-3.001,-0.324) 7(-3.001,-0.975) 8(-3.001,-1.625) 9(-3.001,-2.275) 10(-3.001,-2.925) 11(3.001,-2.925) 12(3.001,-2.275) 13(3.001,-1.625) 14(3.001,-0.975) 15(3.001,-0.325) 16(3.001,0.325) 17(3.001,0.975) 18(2.996,1.625)
  silkscreen extent -3.25,-3.31 1.91,3.53
"VHF SWR METER" [mil]
  round 60 hole 36: 1(-465,-95) 2(465,-95) 3(-370,95) 4(380,95) 5(5,95)
  silkscreen extent -525,-150 520,150

## Free pads (board coordinates)
  round 0 hole 2.1: 1(152.74,55.626) 2(144.44,55.626)
  rect 2x2 smd: 3(337.058,172.974)
  round 5 hole 3.1: 4(152.146,105.664)
  rect 10x5 smd: 7(113.538,170.18) 8(174.244,170.18)

## Via types
v1: diameter 1, hole 0.61, Top Layer to Bottom Layer, 525 vias
v2: diameter 0.61, hole 0.305, Top Layer to Bottom Layer, 207 vias
v3: diameter 4, hole 3.1, Top Layer to Bottom Layer, 7 vias
v4: diameter 0.61, hole 0.306, Top Layer to Bottom Layer, 3 vias
v5: diameter 0.5, hole 0.305, Top Layer to Bottom Layer, 3 vias
v6: diameter 0.61, hole 0.4, Top Layer to Bottom Layer, 1 vias
v7: diameter 1, hole 0.4, Top Layer to Bottom Layer, 1 vias